# EAGLE board main (EAGLE 5.11)
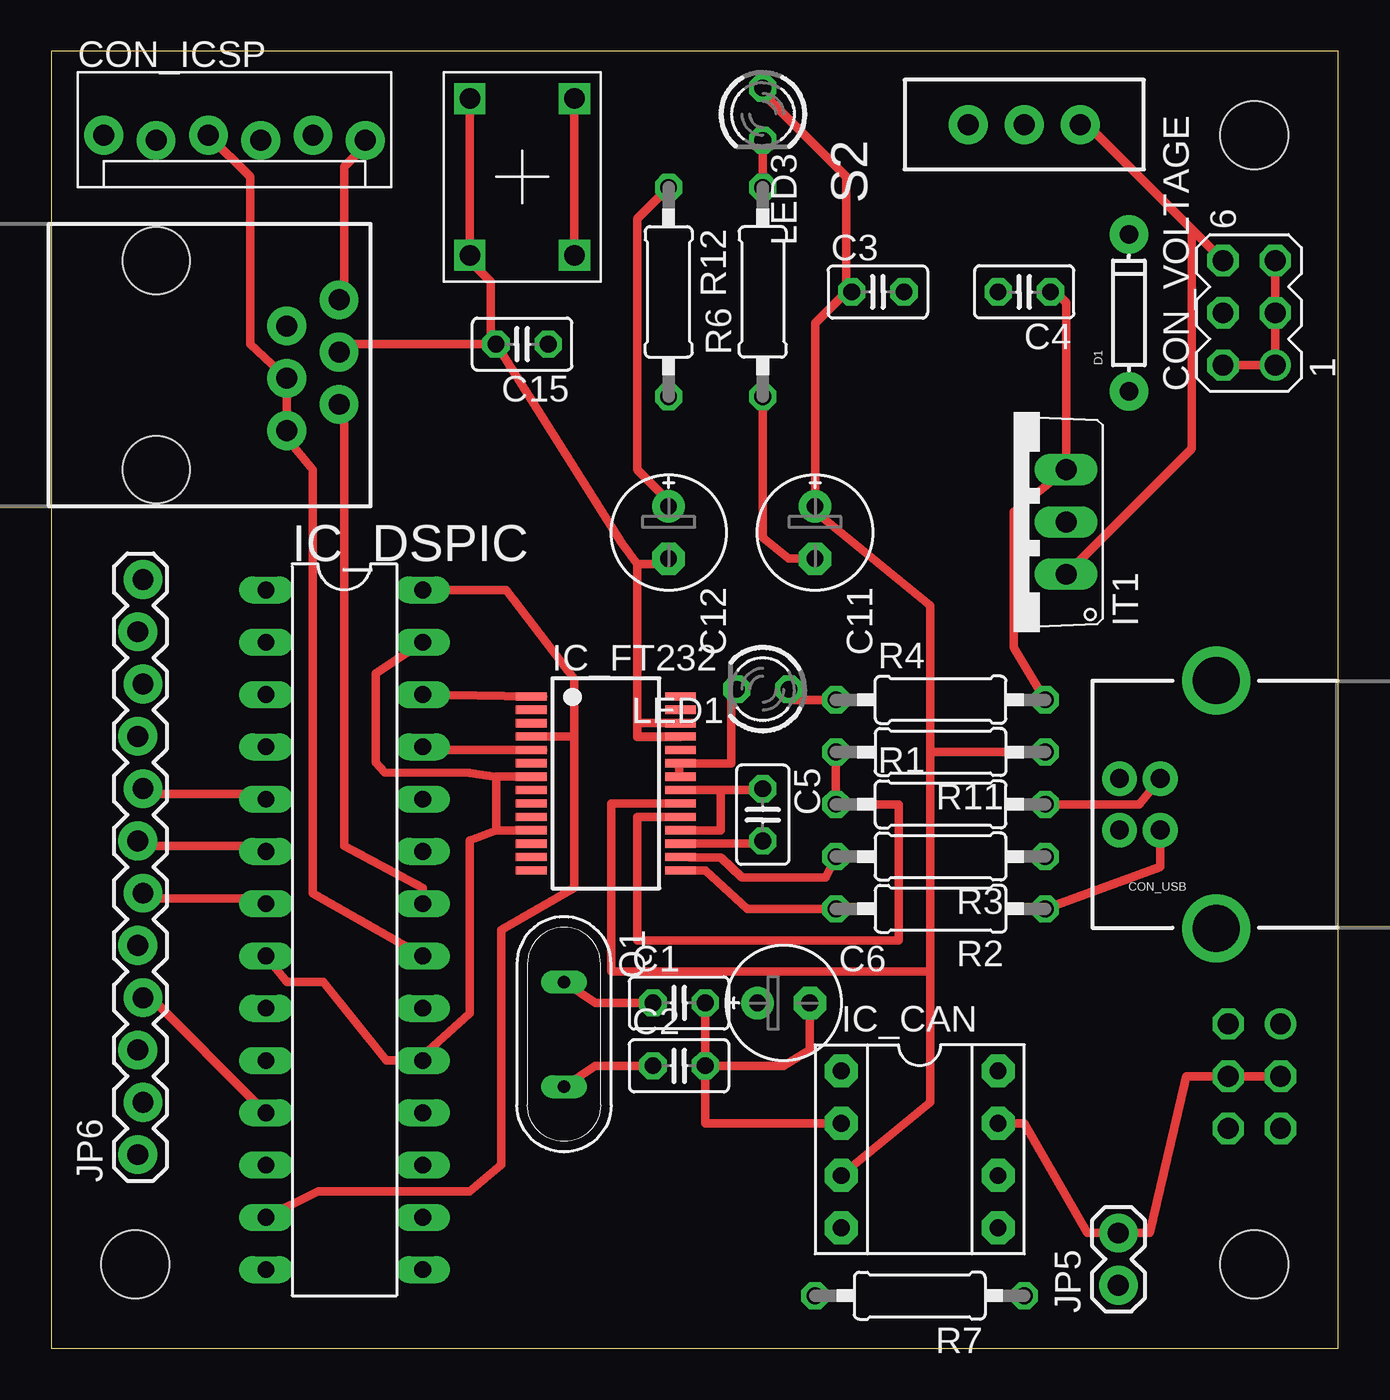
[diagram p0: board, top side]
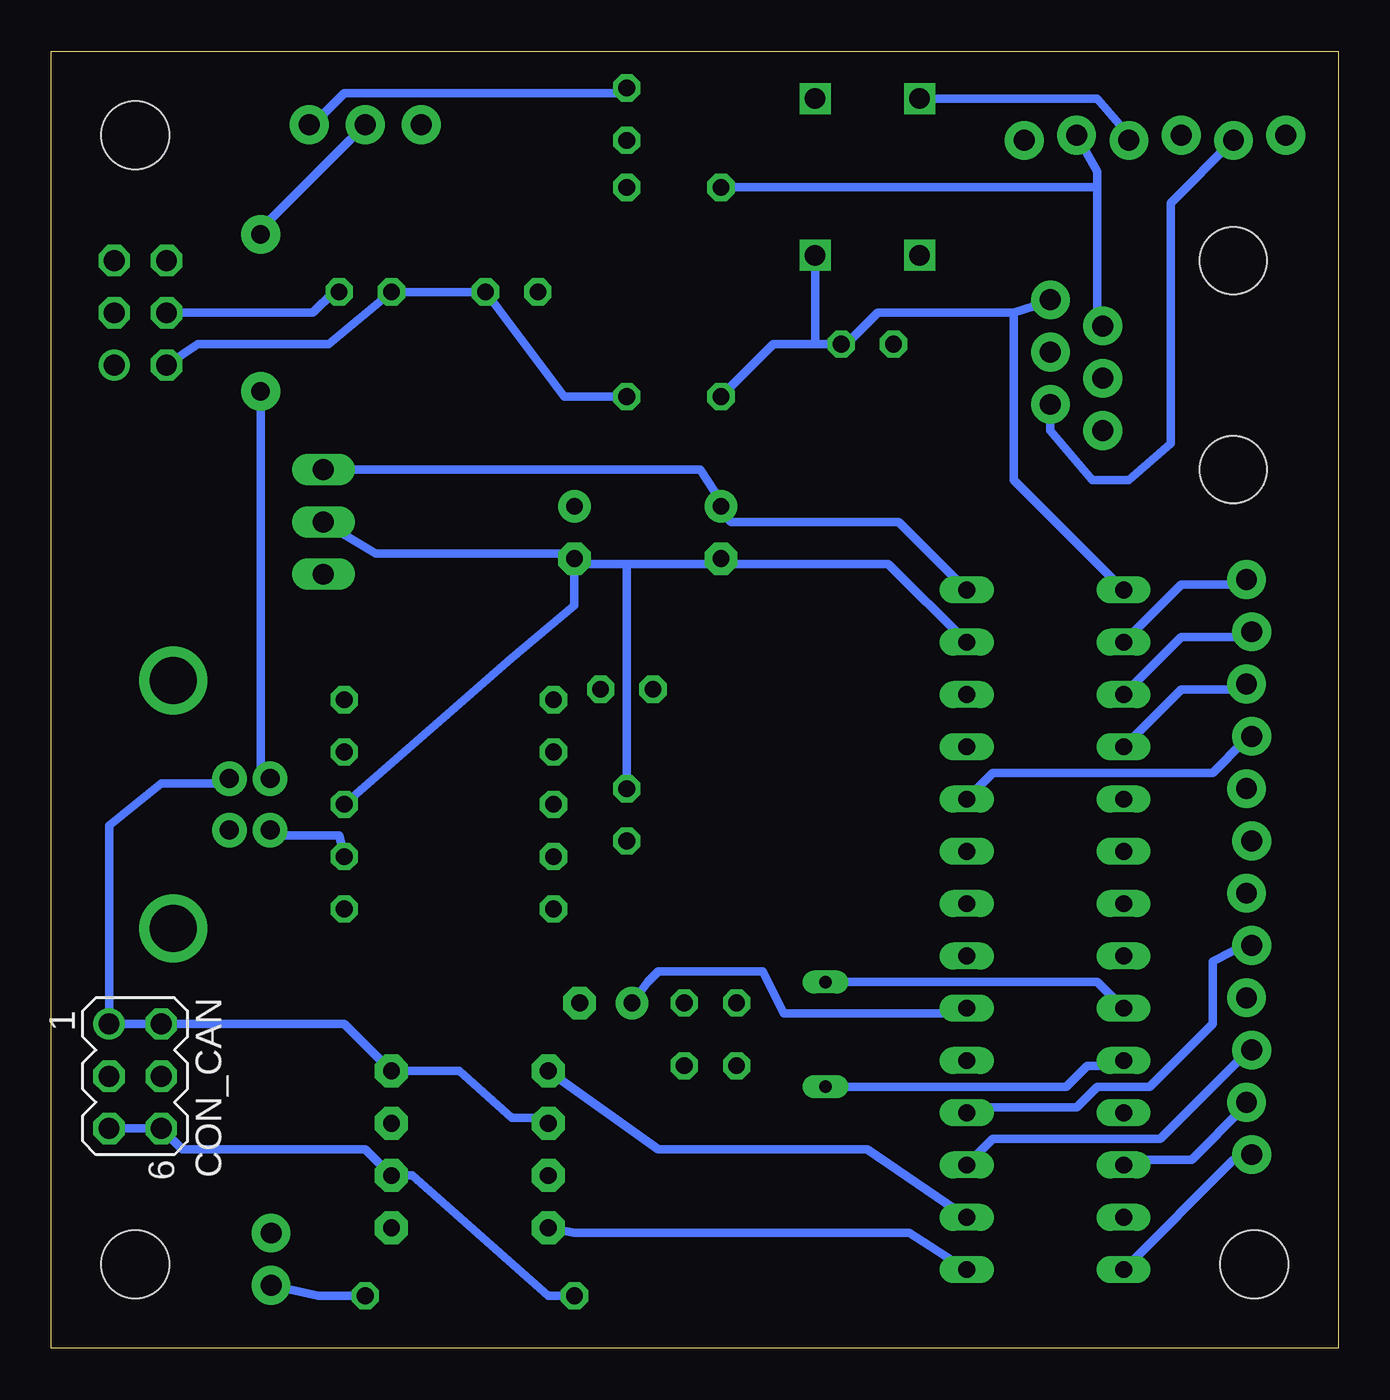
[diagram p1: board, bottom side, seen from below]

Size 62.48 x 62.99 mm. Coordinates in mm from the lower left corner, seen from the top.
Outline: 0,0 62.48,0 62.48,62.99 0,62.99 0,0
Copper layers (1*16): Top 0.035mm / dielectric 1.5mm / Bottom 0.035mm
Design rules "default *": minimum track width 16mil, minimum drill 24mil, track to track 20mil, track to pad 8mil, pad to pad 8mil, via to via 8mil, smd to smd 8mil, copper to edge 40mil, drill to drill 8mil, minimum pad ring 10mil, minimum via ring 8mil, stop-mask expansion 4mil, vias tented up to drill 0mil, thermal gap 10mil
Net classes: 0 default: width 0.203 mm, drill 0.508 mm, clearance 0.203 mm

## Footprints (pad centres in the part's own frame; a part is rotated, then mirrored left to right if it is on the bottom)
C025-025X050 = drill 0.813 octagon: 1 -1.27,0; 2 1.27,0
E2,5-6E = drill 0.813 pad 1.575 round: + -1.27,0 | drill 0.813 pad 1.575 octagon: - 1.27,0
MA03-2 = drill 1.016 round: 1 -2.54,-1.27 | drill 1.016 octagon: 2 -2.54,1.27; 3 0,-1.27; 4 0,1.27; 5 2.54,-1.27; 6 2.54,1.27
MOLEX-1X6_LOCK = drill 1.016 pad 1.88 round: 1 0,0; 2 2.54,-0.254; 3 5.08,0; 4 7.62,-0.254; 5 10.16,0; 6 12.7,-0.254
RJ11-6 = drill 1.016 pad 1.88 round: 1 1.905,8.89; 2 3.175,6.35; 3 4.445,8.89; 4 5.715,6.35; 5 6.985,8.89; 6 8.255,6.35 | hole 3.251: 0,0; 10.16,0
USB-B-PTH = drill 0.914 pad 1.676 round: D+ 0,1.25; D- 1.981,1.25; GND 0,-1.25; VBUS 1.981,-1.25 | drill 2.286 round: S1 -2.718,-6.02; S2 -2.718,6.02
DIODE-1N4148 = drill 0.9 pad 1.88 round: A -3.81,0; C 3.81,0
DIL08 = drill 0.813 pad 1.6 octagon: 1 -3.81,-3.81; 2 -1.27,-3.81; 3 1.27,-3.81; 4 3.81,-3.81; 5 3.81,3.81; 6 1.27,3.81; 7 -1.27,3.81; 8 -3.81,3.81
DIL28-3 = drill 0.813 long: 1 -16.51,-3.81; 2 -13.97,-3.81; 3 -11.43,-3.81; 4 -8.89,-3.81; 5 -6.35,-3.81; 6 -3.81,-3.81; 7 -1.27,-3.81; 8 1.27,-3.81; 9 3.81,-3.81; 10 6.35,-3.81; 11 8.89,-3.81; 12 11.43,-3.81; 13 13.97,-3.81; 14 16.51,-3.81; 15 16.51,3.81; 16 13.97,3.81; 17 11.43,3.81; 18 8.89,3.81; 19 6.35,3.81; 20 3.81,3.81; 21 1.27,3.81; 22 -1.27,3.81; 23 -3.81,3.81; 24 -6.35,3.81; 25 -8.89,3.81; 26 -11.43,3.81; 27 -13.97,3.81; 28 -16.51,3.81
SSOP28 = smd 0.4 x 1.5: 1 -4.225,-3.625; 2 -3.575,-3.625; 3 -2.925,-3.625; 4 -2.275,-3.625; 5 -1.625,-3.625; 6 -0.975,-3.625; 7 -0.325,-3.625; 8 0.325,-3.625; 9 0.975,-3.625; 10 1.625,-3.625; 11 2.275,-3.625; 12 2.925,-3.625; 13 3.575,-3.625; 14 4.225,-3.625; 15 4.225,3.625; 16 3.575,3.625; 17 2.925,3.625; 18 2.275,3.625; 19 1.625,3.625; 20 0.975,3.625; 21 0.325,3.625; 22 -0.325,3.625; 23 -0.975,3.625; 24 -1.625,3.625; 25 -2.275,3.625; 26 -2.925,3.625; 27 -3.575,3.625; 28 -4.225,3.625
TO220V = drill 1.016 long: 1 -2.54,-2.54; 2 0,-2.54; 3 2.54,-2.54
STAND-OFF = hole 3.302: 0,0
1X02 = drill 1.016 pad 1.88 round: 1 0,0; 2 2.54,0
1X12_LOCK = drill 1.016 pad 1.88 round: 1 0,0.127; 2 2.54,-0.127; 3 5.08,0.127; 4 7.62,-0.127; 5 10.16,0.127; 6 12.7,-0.127; 7 15.24,0.127; 8 17.78,-0.127; 9 20.32,0.127; 10 22.86,-0.127; 11 25.4,0.127; 12 27.94,-0.127
LED3MM = drill 0.813 octagon: A -1.27,0; K 1.27,0
QS = drill 0.61 long: 1 -2.54,0; 2 2.54,0
0207/10 = drill 0.813 octagon: 1 -5.08,0; 2 5.08,0
KSA_SEALED_TAC_SWITCH = drill 1 square: P$1 -3.81,2.54; P$2 3.81,2.54; P$3 -3.81,-2.54; P$4 3.81,-2.54
SWITCH-SPDT_KIT = drill 1.016 pad 1.88 round: 1 0,2.718; 2 0,0; 3 0,-2.718

## Placement (x,y rotation side)
C1  47pf  [C025-025X050]  30.48,16.76 0 top
C2  47pf  [C025-025X050]  30.48,13.72 0 top
C3  47nf  [C025-025X050]  40.13,51.31 0 top
C4  47nf  [C025-025X050]  47.24,51.31 180 top
C5  100nf  [C025-025X050]  34.54,25.91 270 top
C6  33uf  [E2,5-6E]  35.56,16.76 0 top
C11  33uf  [E2,5-6E]  37.08,39.62 270 top
C12  33uf  [E2,5-6E]  29.97,39.62 270 top
C15  47pf  [C025-025X050]  22.86,48.77 180 top
CON_CAN  [MA03-2]  58.42,13.21 270 bottom
CON_ICSP  PIC-ICSPPOLAR_LOCK  [MOLEX-1X6_LOCK]  2.54,58.93 0 top
CON_RJ11  RJ11-6PTH  [RJ11-6]  5.08,52.83 270 top
CON_USB  USBPTH  [USB-B-PTH]  53.85,26.42 180 top
CON_VOLTAGE  [MA03-2]  58.17,50.29 90 top
D1  [DIODE-1N4148]  52.32,50.29 90 top
IC_CAN  MCP2551/P  [DIL08]  42.16,9.65 270 top
IC_DSPIC  DSPIC33FJ128MC802-SP  [DIL28-3]  14.22,20.32 270 top
IC_FT232  FT232RL  [SSOP28]  26.92,27.43 270 top
IT1  LM3940IT-3.3  [TO220V]  46.74,40.13 90 top
JP2  STAND-OFF  [STAND-OFF]  58.42,58.93 0 top
JP3  STAND-OFF  [STAND-OFF]  58.42,4.06 0 top
JP4  STAND-OFF  [STAND-OFF]  4.06,4.06 0 top
JP5  [1X02]  51.82,3.05 90 top
JP6  M12LOCK  [1X12_LOCK]  4.32,9.4 90 top
LED1  [LED3MM]  34.54,32 180 top
LED3  [LED3MM]  34.54,59.94 270 top
Q1  10mhz  [QS]  24.89,15.24 270 top
R1  10k  [0207/10]  43.18,26.42 0 top
R2  27  [0207/10]  43.18,21.34 180 top
R3  27  [0207/10]  43.18,23.88 180 top
R4  270  [0207/10]  43.18,31.5 0 top
R6  300  [0207/10]  34.54,51.31 90 top
R7  120  [0207/10]  42.16,2.54 180 top
R11  4.7k  [0207/10]  43.18,28.96 180 top
R12  1k5  [0207/10]  29.97,51.31 270 top
S1  [KSA_SEALED_TAC_SWITCH]  22.86,56.9 270 top
S2  [SWITCH-SPDT_KIT]  47.24,59.44 90 top

## Library data of the parts
C1-C6 C11 C12 C15 R1-R4 R6 R7 R11 R12 = resistor
CON_CAN CON_VOLTAGE = con-lstb; OC_FARNELL: unknown; OC_NEWARK: unknown
CON_ICSP CON_RJ11 CON_USB D1 JP2-JP6 S1 S2 = SparkFun
IC_CAN = microchip-dspic
IC_DSPIC = microchip-dspic33fjxxmc
IC_FT232 = ftdichip; MPN: FT232RL; OC_FARNELL: 1146032; OC_NEWARK: 91K9918
IT1 = LM3940
LED1 LED3 = led
Q1 = special

## Nets
3V3: C4.1 C12.+ CON_ICSP.5 CON_RJ11.2 CON_VOLTAGE.4 IC_DSPIC.13 IC_DSPIC.28 IC_FT232.4 IT1.3 R4.2 R12.1
5V: C3.1 C11.+ CON_VOLTAGE.6 IC_CAN.3 IC_FT232.20 IT1.1 LED3.A R11.1 S2.3
DSPIC_MCLR: C15.1 CON_ICSP.6 CON_RJ11.1 IC_DSPIC.1 R12.2 S1.P$1 S1.P$2
DSPIC_OSCI: C1.1 IC_DSPIC.9 Q1.1
DSPIC_OSCO: C2.1 IC_DSPIC.10 Q1.2
DSPIC_PGC: CON_ICSP.2 CON_RJ11.5 IC_DSPIC.22
DSPIC_PGD: CON_ICSP.3 CON_RJ11.4 IC_DSPIC.21
DSPIC_RA0: IC_DSPIC.2 JP6.12
DSPIC_RA1: IC_DSPIC.3 JP6.11
DSPIC_RA4: IC_DSPIC.12 JP6.2
DSPIC_RB0: IC_DSPIC.4 JP6.10
DSPIC_RB1: IC_DSPIC.5 JP6.8
DSPIC_RB2: IC_DSPIC.6 JP6.7
DSPIC_RB3: IC_DSPIC.7 JP6.6
DSPIC_RB4: IC_DSPIC.11 JP6.4
DSPIC_RB5: IC_DSPIC.14 JP6.1
DSPIC_RB8: IC_DSPIC.17 JP6.3
DSPIC_RB9: IC_DSPIC.18 JP6.5
DSPIC_RB13: IC_DSPIC.24 JP6.9
DSPIC_VCAP: C6.+ IC_DSPIC.20
FT232_OSCI: IC_FT232.27
FT232_OSCO: IC_FT232.28
FT232_RST: IC_FT232.19 R1.1 R11.2
FT232_RX: IC_DSPIC.25 IC_FT232.5
FT232_TX: IC_DSPIC.26 IC_FT232.1
FT232_VOUT: C5.2 IC_FT232.17
GND: C1.2 C2.2 C3.2 C4.2 C5.1 C6.- C11.- C12.- C15.2 CON_CAN.1 CON_CAN.2 CON_ICSP.4 CON_RJ11.3 CON_USB.GND CON_VOLTAGE.1 CON_VOLTAGE.2 CON_VOLTAGE.3 CON_VOLTAGE.5 IC_CAN.2 IC_CAN.8 IC_DSPIC.8 IC_DSPIC.19 IC_DSPIC.27 IC_FT232.7 IC_FT232.11 IC_FT232.18 IC_FT232.21 IC_FT232.25 IC_FT232.26 IT1.2 R1.2 R6.1 S1.P$3 S1.P$4
MCP_CANH: CON_CAN.3 CON_CAN.4 IC_CAN.7 JP5.2
MCP_CANL: CON_CAN.5 CON_CAN.6 IC_CAN.6 R7.2
MCP_CANRX: IC_CAN.4 IC_DSPIC.15
MCP_CANTX: IC_CAN.1 IC_DSPIC.16
N$1: D1.C S2.2
N$2: LED3.K R6.2
N$4: JP5.1 R7.1
N$13: IC_FT232.15 R2.2
N$17: IC_FT232.16 R3.2
N$18: IC_FT232.22 IC_FT232.23 LED1.K
N$20: LED1.A R4.1
USB_5V: CON_USB.VBUS D1.A
USB_DATAM: CON_USB.D- R3.1
USB_DATAP: CON_USB.D+ R2.1

## Tracks (layer width: path | path; a pad name or v marks a point on that pad's centre or on a via)
3V3
  Top 0.406: R4.2 46.74,34.04 46.74,40.64 IT1.3 49.28,50.8 48.77,51.31 C4.1 | R12.1 28.45,54.86 28.45,42.67 29.97,41.15 C12.+ | 25.4,29.71 25.4,32.51 22.1,36.83 IC_DSPIC.28 | IC_FT232.4 25.4,29.71 | 25.4,29.71 25.4,22.35 21.84,20.32 21.84,8.89 20.32,7.62 12.95,7.62 IC_DSPIC.13
  Bottom 0.406: CON_VOLTAGE.4 49.78,50.29 48.77,51.31 C4.1 | 11.68,56.39 11.68,57.15 CON_ICSP.5 | 11.68,56.39 11.68,50.29 CON_RJ11.2 | R12.1 11.68,56.39 | IT1.3 30.99,42.67 29.97,41.15 C12.+ 29.97,40.64 29.46,40.13 21.34,40.13 IC_DSPIC.28
5V
  Top 0.406: 55.37,54.36 50.29,59.44 S2.3 | 55.37,54.36 CON_VOLTAGE.6 | IT1.1 55.37,43.69 55.37,54.36 | 38.61,51.31 37.08,49.78 C11.+ 37.08,40.64 42.67,36.07 42.67,28.96 | 38.61,51.31 38.61,56.9 34.54,60.96 LED3.A | 38.61,51.31 C3.1 | IC_CAN.3 42.67,11.94 42.67,18.29 | 42.67,18.29 42.67,28.96 | IC_FT232.20 27.18,26.46 27.18,18.29 42.67,18.29 | 42.67,28.96 R11.1
  Bottom 0.406: S2.3 49.78,59.44 48.26,60.96 34.54,60.96 LED3.A
DSPIC_MCLR
  Top 0.406: S1.P$2 S1.P$1 | CON_ICSP.6 15.24,58.42 14.22,57.4 14.22,51.31 CON_RJ11.1
  Bottom 0.406: R12.2 27.43,48.77 25.4,48.77 | 25.4,48.77 C15.1 23.88,48.77 22.35,50.29 15.75,50.29 | 25.4,48.77 S1.P$2 | 15.75,50.29 15.75,42.16 IC_DSPIC.1 | 15.75,50.29 14.22,50.8 CON_RJ11.1
DSPIC_OSCI
  Top 0.406: C1.1 26.42,16.76 Q1.1
  Bottom 0.406: Q1.1 11.68,17.78 IC_DSPIC.9
DSPIC_OSCO
  Top 0.406: C2.1 26.42,13.72 Q1.2
  Bottom 0.406: Q1.2 13.21,12.7 12.19,13.72 10.67,13.72 IC_DSPIC.10
DSPIC_PGC
  Top 0.406: CON_RJ11.5 14.22,44.83 14.22,24.38 18.03,22.35 IC_DSPIC.22
  Bottom 0.406: CON_ICSP.2 8.13,55.63 8.13,43.94 10.16,42.16 11.94,42.16 13.97,44.58 CON_RJ11.5
DSPIC_PGD
  Top 0.406: CON_ICSP.3 9.65,56.9 9.65,48.77 CON_RJ11.4 11.43,44.2 12.7,42.67 12.7,22.1 IC_DSPIC.21
DSPIC_RA0
  Bottom 0.406: IC_DSPIC.2 7.62,37.08 4.57,37.08 JP6.12
DSPIC_RA1
  Bottom 0.406: IC_DSPIC.3 7.62,34.54 4.57,34.54 JP6.11
DSPIC_RA4
  Bottom 0.406: IC_DSPIC.12 10.16,9.14 7.11,9.14 4.57,11.68 JP6.2
DSPIC_RB0
  Bottom 0.406: IC_DSPIC.4 7.62,32 4.57,32 JP6.10
DSPIC_RB1
  Top 0.406: IC_DSPIC.5 10.16,26.92 4.57,26.92 JP6.8
DSPIC_RB2
  Top 0.406: IC_DSPIC.6 10.16,24.38 4.57,24.38 JP6.7
DSPIC_RB3
  Top 0.406: IC_DSPIC.7 10.16,21.84 4.57,21.84 JP6.6
DSPIC_RB4
  Top 0.406: IC_DSPIC.11 4.57,17.27 JP6.4
DSPIC_RB5
  Bottom 0.406: IC_DSPIC.14 5.08,9.14 4.57,9.14 JP6.1
DSPIC_RB8
  Bottom 0.406: IC_DSPIC.17 16.76,10.16 8.64,10.16 4.57,14.22 JP6.3
DSPIC_RB9
  Bottom 0.406: IC_DSPIC.18 17.78,11.68 12.7,11.68 11.68,12.7 9.14,12.7 6.1,15.75 6.1,18.8 5.08,19.3 4.57,19.3 JP6.5
DSPIC_RB13
  Bottom 0.406: IC_DSPIC.24 16.76,27.94 6.1,27.94 4.57,29.46 JP6.9
DSPIC_VCAP
  Bottom 0.406: IC_DSPIC.20 18.29,16.26 26.92,16.26 27.94,18.29 33.02,18.29 33.53,17.78 C6.+
FT232_RST
  Top 0.406: R11.2 R1.1 41.15,26.42 41.15,19.81 28.45,19.81 28.45,25.81 IC_FT232.19
FT232_RX
  Top 0.406: IC_DSPIC.25 18.54,29.21 18.77,29.05 23.27,29.05 | 23.88,29.06 23.27,29.05 | 23.27,29.05 IC_FT232.5
FT232_TX
  Top 0.406: IC_DSPIC.26 IC_FT232.1 | 23.89,31.66 IC_FT232.1 | IC_FT232.1
FT232_VOUT
  Top 0.406: IC_FT232.17 34.54,24.51 C5.2
GND
  Top 0.406: 21.34,48.77 21.34,51.82 20.32,52.83 S1.P$4 S1.P$3 | 21.34,48.77 14.22,48.77 CON_RJ11.3 | 21.34,48.77 C15.2 27.69,39.12 28.45,38.1 | R1.2 52.83,26.42 CON_USB.GND | CON_VOLTAGE.2 CON_VOLTAGE.1 CON_VOLTAGE.3 CON_VOLTAGE.5 | R6.1 34.54,39.37 35.81,38.35 C11.- | 32.51,27.11 34.54,27.11 C5.1 | 32.51,27.11 IC_FT232.21 | 21.59,25.16 IC_FT232.11 | 17.78,13.97 IC_DSPIC.19 | 17.78,13.97 20.32,16.26 20.32,24.65 21.59,25.16 | IC_FT232.26 28.45,30.36 28.45,29.7 IC_FT232.25 28.45,29.71 28.45,38.1 | 28.45,38.1 29.97,38.1 C12.- | C2.2 C1.2 | IC_CAN.2 31.75,10.92 C2.2 | 21.59,25.16 23.62,25.15 | 21.59,25.16 21.6,27.74 | 21.6,27.74 21.59,27.76 IC_FT232.7 21.6,27.74 | IC_FT232.18 32.51,25.16 32.51,27.11 | C6.- 36.83,14.48 35.56,13.72 C2.2 | 17.78,13.97 16.26,13.97 13.21,17.78 11.43,17.78 IC_DSPIC.8 | 21.6,27.74 20.31,27.95 16.19,27.96 15.75,28.45 15.75,32.77 IC_DSPIC.27
  Bottom 0.406: S1.P$3 11.68,60.71 10.16,58.93 CON_ICSP.4 | CON_USB.GND 54.1,27.43 57.15,27.43 59.69,25.4 CON_CAN.1 CON_CAN.2 48.26,15.75 IC_CAN.8 42.67,13.46 40.13,11.18 38.35,11.18 IC_CAN.2 | 29.97,38.1 21.84,38.1 IC_DSPIC.27 | 34.54,38.1 37.08,38.1 C11.- | 34.54,38.1 C5.1 | IT1.2 46.74,38.61 37.08,38.61 C11.- | 29.97,38.1 34.54,38.1 | 29.97,38.1 C12.- | R1.2 40.13,33.53 37.08,36.07 C11.- | R6.1 37.59,46.23 C3.2 C4.2 49.02,48.77 55.37,48.77 CON_VOLTAGE.2
MCP_CANH
  Top 0.406: CON_CAN.3 CON_CAN.4 55.12,13.21 53.34,5.59 JP5.2 50.29,5.59 47.24,10.92 IC_CAN.7
MCP_CANL
  Bottom 0.406: R7.2 38.35,2.54 44.96,8.38 IC_CAN.6 47.24,9.65 56.13,9.65 CON_CAN.6 CON_CAN.5
MCP_CANRX
  Bottom 0.406: IC_DSPIC.15 20.83,5.59 37.08,5.59 IC_CAN.4
MCP_CANTX
  Bottom 0.406: IC_DSPIC.16 22.86,9.65 33.02,9.65 IC_CAN.1
N$1
  Bottom 0.406: S2.2 52.32,54.36 D1.C
N$2
  Top 0.406: R6.2 LED3.K
N$4
  Bottom 0.406: R7.1 49.53,2.54 JP5.1
N$13
  Top 0.406: IC_FT232.15 31.75,23.2 33.78,21.34 R2.2
N$17
  Top 0.406: R3.2 37.59,22.86 33.53,22.86 32.51,23.84 30.99,23.84 IC_FT232.16
N$18
  Top 0.406: IC_FT232.22 30.48,27.94 30.47,28.41 IC_FT232.23 30.99,28.41 33.01,28.41 33.02,32 LED1.K
N$20
  Top 0.406: R4.1 36.07,31.5 LED1.A
USB_5V
  Bottom 0.406: CON_USB.VBUS 52.32,27.94 D1.A
USB_DATAM
  Bottom 0.406: R3.1 48.51,24.89 51.82,24.89 CON_USB.D-
USB_DATAP
  Top 0.406: R2.1 53.85,23.37 CON_USB.D+